# Altium PCB pcb_micro.PcbDoc
Units mil, origin at the board's own origin, x right, y up, seen from the top; angles counter-clockwise.
Board outline 6000 x 4000 mil, 2 copper layers (Top Layer, Bottom Layer); 6 components, 14 nets, 55 pads, 0 vias.
Unrouted connection lines stored in the file: 23.
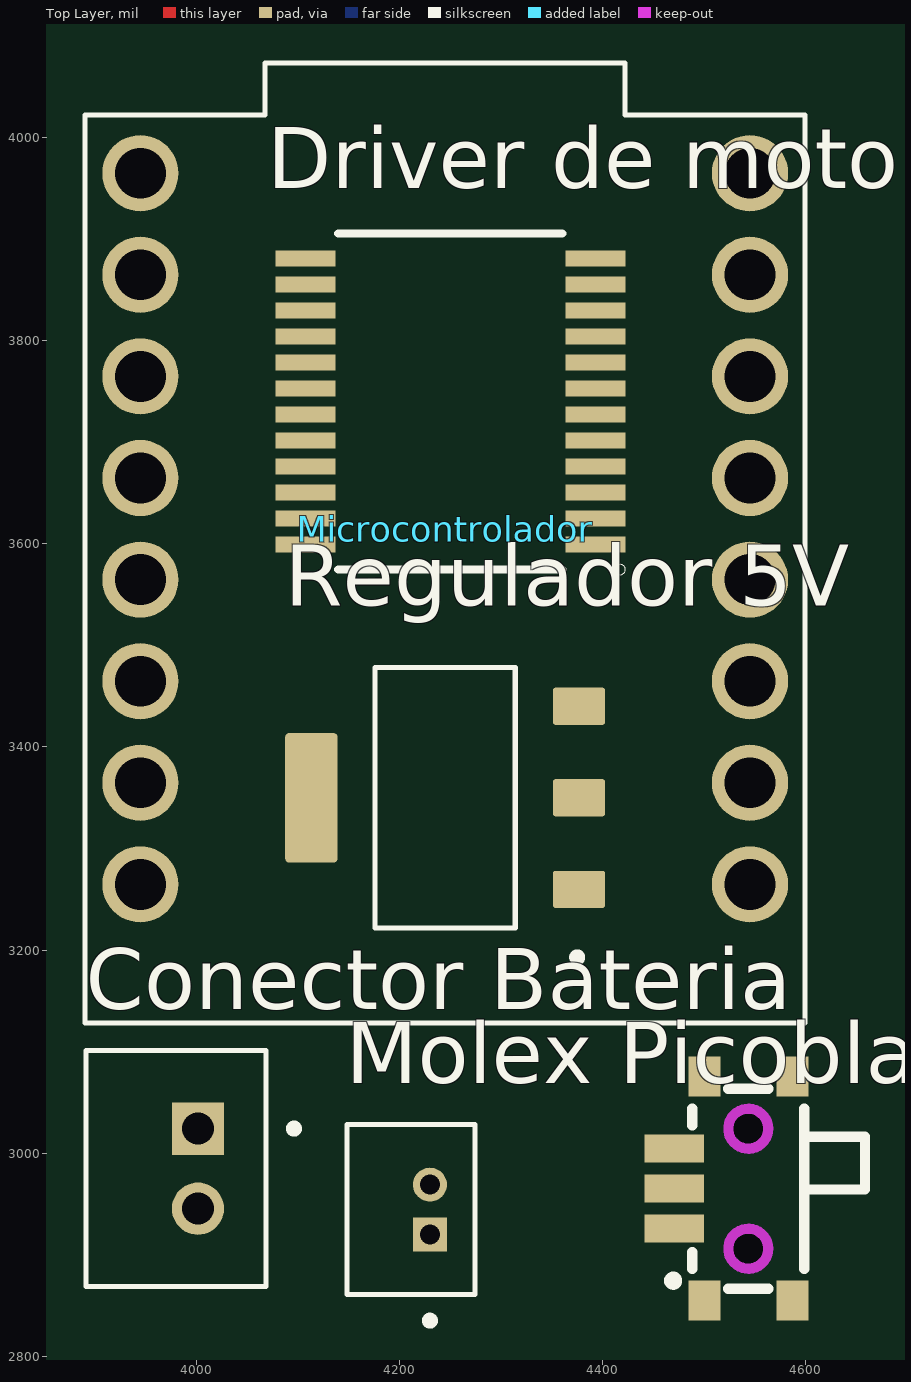
[diagram p0: Top Layer view]
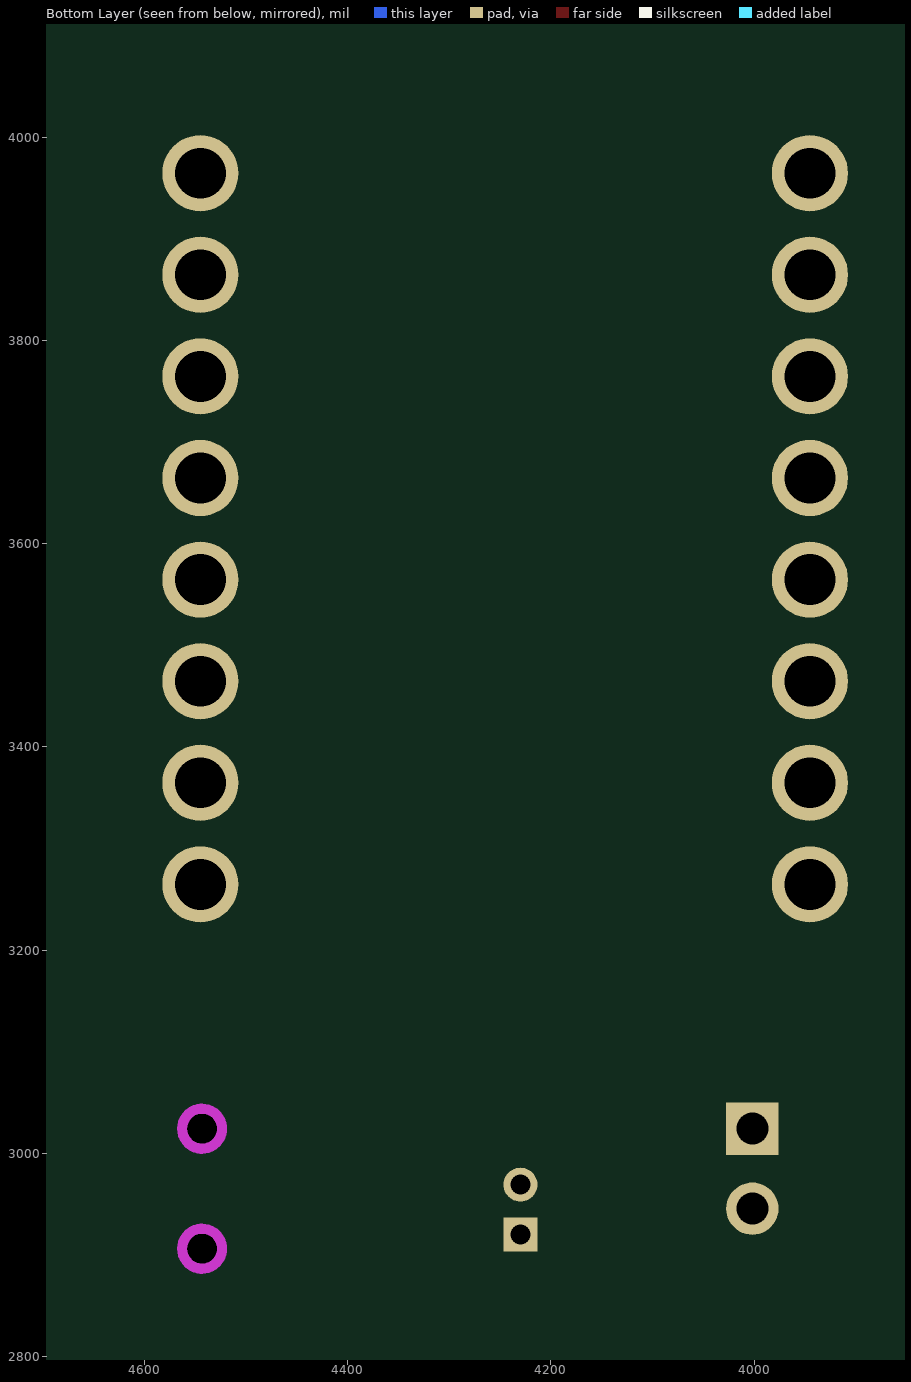
[diagram p1: Bottom Layer view, seen from below]

## Layer stack, top to bottom
Top Solder: solder mask 0.4, Solder Resist, Dk 3.5
Top Layer: signal copper 1.4
Dielectric 1: dielectric 12.6, FR-4, Dk 4.8
Bottom Layer: signal copper 1.4
Bottom Solder: solder mask 0.4, Solder Resist, Dk 3.5

## Board outline
1000,1000 7000,1000 7000,5000 1000,5000

## Design rules (kind name [scope] priority, off if disabled: settings)
Clearance [All] p1: gap=10 ignorepadtopadclearanceinfootprint=FALSE
PolygonConnect [All] p1: connectstyle=Relief reliefconductorwidth=10 reliefentries=4 polygonreliefangle="90 Angle" airgapwidth=10
RoutingVias [All] p1: holewidth=28 width=50 viastyle="Through Hole" minholewidth=28 minwidth=50 maxholewidth=28 maxwidth=50
SolderMaskExpansion [All] p1: expansion=4 istentingtop=FALSE
Width [All] p1: maxlimit=10 minlimit=10 preferedwidth=10
30 further rules are at their usual default settings.

## Components (designator, comment, footprint, x,y, rotation, side; value= is the part's Value field where it differs from the comment)
"Conector Bateria" "B2B-PH-K-S(LF)(SN)" JST_B2B-PH-K-S(LF)(SN) 3980,2985 r90 top
"Driver de motor" "TB6612FNG" "TB6612 SMD" 4250,3740 r180 top
Microcontrolador "ESP32-C3_SUPERMINI_TH" MODULE_ESP32-C3_SUPERMINI 4245,3575 r0 top
"Molex Picoblade" "53047-0210" MOLEX_53047-0210 4230,2944.61 r90 top
"Regulador 5V" "AMS1117-5.0" "AMS1117 5V" 4245,3350 r90 top
? "SW-SMD_SK-3293S" SW-SMD_SK-3293S 4528.45,2965.24 r90 top

## Footprints (in the part's own frame and the unit in brackets; to place one, negate y for a bottom-side part, rotate by r counter-clockwise, add the part's x,y. Pads: shape width x height; smd on the part's side, far side on the other; paste and mask are expansions set on the pad)
"AMS1117 5V" [mm]
  rrect15% 0.93x1.31 smd: 1(-2.29,-3.345) 2(0,-3.345) 3(2.29,-3.345)
  rrect15% 3.24x1.31 smd: 4(0,3.345)
  silkscreen extent -4.09,-3.4 3.25,1.75, body extent -3.25,-3.5 3.25,3.5, height 1.8
JST_B2B-PH-K-S(LF)(SN) [mm]
  rect 1.308x1.308 / inner round 1.308 / far side rect 1.308x1.308 hole 0.8: 1(1,-0.55)
  round 1.308 hole 0.8: 2(-1,-0.55)
  silkscreen extent -2.95,-3.05 2.95,2.25, body extent -2.95,-2.25 2.95,2.25, height 6
MODULE_ESP32-C3_SUPERMINI [mm]
  round 1.905 hole 1.27: 0(7.62,-7.88) 1(7.62,-5.34) 2(7.62,-2.8) 3(7.62,-0.26) 3.3(7.62,4.82) 4(7.62,2.28) 5(-7.62,9.9) 5V(7.62,9.9) 6(-7.62,7.36) 7(-7.62,4.82) 8(-7.62,2.28) 9(-7.62,-0.26) 10(-7.62,-2.8) 20(-7.62,-5.34) 21(-7.62,-7.88) G(7.62,7.36)
  silkscreen extent -9,-11.35 9,12.65
MOLEX_53047-0210 [mm]
  rect 0.85x0.85 / inner round 0.85 / far side rect 0.85x0.85 hole 0.5: 01(-0.625,0)
  round 0.85 hole 0.5: 02(0.625,0)
  silkscreen extent -2.87,-1.12 2.12,2.07
SW-SMD_SK-3293S [mm]
  rect 0.7x1.49 smd: 1(-1,1.477) 2(0,1.477) 3(1,1.477)
  rect 1x0.8 smd: 4(-2.8,-1.478) 4(-2.8,0.723) 4(2.8,-1.478) 4(2.8,0.723)
  Keep-Out Layer board cut-out: -1,-0.377 -1.05,-0.161 -1.188,0.013 -1.389,0.11 -1.611,0.11 -1.812,0.013 -1.951,-0.161 -2,-0.377 -2,-0.377 -1.951,-0.594 -1.812,-0.768 -1.611,-0.865 -1.389,-0.865 -1.188,-0.768 -1.05,-0.594 -1,-0.377 -1,-0.377
  Keep-Out Layer board cut-out: 2,-0.377 1.95,-0.161 1.812,0.013 1.611,0.11 1.389,0.11 1.188,0.013 1.049,-0.161 1,-0.377 1,-0.377 1.049,-0.594 1.188,-0.768 1.389,-0.865 1.611,-0.865 1.812,-0.768 1.95,-0.594 2,-0.377 2,-0.377
  Keep-Out Layer circle w0.025: c-1.5,-0.377 r0.5
  Keep-Out Layer circle w0.254: c-1.5,-0.377 r0.5
  Keep-Out Layer circle w0.025: c1.5,-0.377 r0.5
  Keep-Out Layer circle w0.254: c1.5,-0.377 r0.5
  silkscreen extent -2.5,-3.3 2.5,1.6
"TB6612 SMD" [mm]
  rect 1.5x0.4 smd: 1(-3.625,3.575) 2(-3.625,2.925) 3(-3.625,2.275) 4(-3.625,1.625) 5(-3.625,0.975) 6(-3.625,0.325) 7(-3.625,-0.325) 8(-3.625,-0.975) 9(-3.625,-1.625) 10(-3.625,-2.275) 11(-3.625,-2.925) 12(-3.625,-3.575) 13(3.625,-3.575) 14(3.625,-2.925) 15(3.625,-2.275) 16(3.625,-1.625) 17(3.625,-0.975) 18(3.625,-0.325) 19(3.625,0.325) 20(3.625,0.975) 21(3.625,1.625) 22(3.625,2.275) 23(3.625,2.925) 24(3.625,3.575)
  silkscreen extent -4.38,-4.2 2.8,4.33, body extent -3.8,-4.15 3.8,4.15, height 1.6

## Part data
"Conector Bateria": "Connector Header Through Hole 2 position 0.079 (2.00mm)", Package=None, Check_prices=https://www.snapeda.com/parts/B2B-PH-K-S%20(LF)(SN)/JST/view-part/?ref=eda, MF=JST, MP="B2B-PH-K-S (LF)(SN)", SnapEDA_Link=https://www.snapeda.com/parts/B2B-PH-K-S%20(LF)(SN)/JST/view-part/?ref=snap
"Driver de motor": library part TB6612FNG(O,C,8,EL, "DC Motor Driver 3V 24-Pin SSOP T/R", Package="SSOP-24 Toshiba", Availability="Not in stock", Check_prices=https://www.snapeda.com/parts/TB6612FNG(O,C,8,EL/Toshiba/view-part/?ref=eda, MF=Toshiba, MP=TB6612FNG(O,C,8,EL, Price=None, SnapEDA_Link=https://www.snapeda.com/parts/TB6612FNG(O,C,8,EL/Toshiba/view-part/?ref=snap
Microcontrolador: "Super tiny ESP32-C3 board", Package=Package, Check_prices=https://www.snapeda.com/parts/ESP32-C3%20SuperMini_TH/Espressif+Systems/view-part/?ref=eda, MF="Espressif Systems", MP="ESP32-C3 SuperMini_TH", SnapEDA_Link=https://www.snapeda.com/parts/ESP32-C3%20SuperMini_TH/Espressif+Systems/view-part/?ref=snap
"Molex Picoblade": "Picoblade Connector, 2 Circuit Single Row, Vertical Throughole PCB", Package=None, Check_prices=https://www.snapeda.com/parts/0530470210/Molex/view-part/?ref=eda, MF=Molex, MP=0530470210, SnapEDA_Link=https://www.snapeda.com/parts/0530470210/Molex/view-part/?ref=snap
"Regulador 5V": "1A LOW DROPOUT VOLTAGE REGULATOR", Package="SOT-223 Seeed Technology", Availability="Not in stock", Check_prices=https://www.snapeda.com/parts/AMS1117-5.0/ams/view-part/?ref=eda, MF=ams, MP=AMS1117-5.0, Price=None, SnapEDA_Link=https://www.snapeda.com/parts/AMS1117-5.0/ams/view-part/?ref=snap

## Nets (pads, with @x,y where several pads share a name; then routed paths per layer and width w, separated by ;. In a path a pad name is that pad's centre, name@x,y a point inside that pad or via, vN(x,y) a via of type N, cw(c..) or ccw(c..) an arc to the next point about the centre after c; other vN are vias at no path point)
3V3: "Driver de motor.19" "Driver de motor.20"
5V: "Regulador 5V.2" Microcontrolador.5V
GND: "Conector Bateria.1" "Driver de motor.3" "Driver de motor.4" "Driver de motor.9" "Driver de motor.10" "Driver de motor.18" "Regulador 5V.1" Microcontrolador.G
MOTOR_DIR_IN1: "Driver de motor.21" Microcontrolador.2
MOTOR_DIR_IN2: "Driver de motor.22" Microcontrolador.3
MOTOR_DIR_OUT1: "Driver de motor.1" "Driver de motor.2"
MOTOR_DIR_OUT2: "Driver de motor.5" "Driver de motor.6"
MOTOR_DIR_PWM: "Driver de motor.23" Microcontrolador.0
MOTOR_ESQ_IN1: "Driver de motor.17" Microcontrolador.4
MOTOR_ESQ_IN2: "Driver de motor.16" Microcontrolador.5
MOTOR_ESQ_OUT1: "Driver de motor.11" "Driver de motor.12"
MOTOR_ESQ_OUT2: "Driver de motor.7" "Driver de motor.8"
MOTOR_ESQ_PWM: "Driver de motor.15" Microcontrolador.1
VBat: "Conector Bateria.2" "Driver de motor.13" "Driver de motor.14" "Driver de motor.24" "Regulador 5V.3"
pads on no net: "Molex Picoblade.01" "Molex Picoblade.02" "Regulador 5V.4" ?.1 ?.2 ?.3 ?.4 Microcontrolador.3.3 Microcontrolador.6 Microcontrolador.7 Microcontrolador.8 Microcontrolador.9 Microcontrolador.10 Microcontrolador.20 Microcontrolador.21